# Altium PCB PCB2.PcbDoc
Units mm, origin at the board's own origin, x right, y up, seen from the top; angles counter-clockwise.
Board outline 80.65 x 74.17 mm, 2 copper layers (Top Layer, Bottom Layer); 29 components, 23 nets, 119 pads, 10 vias.
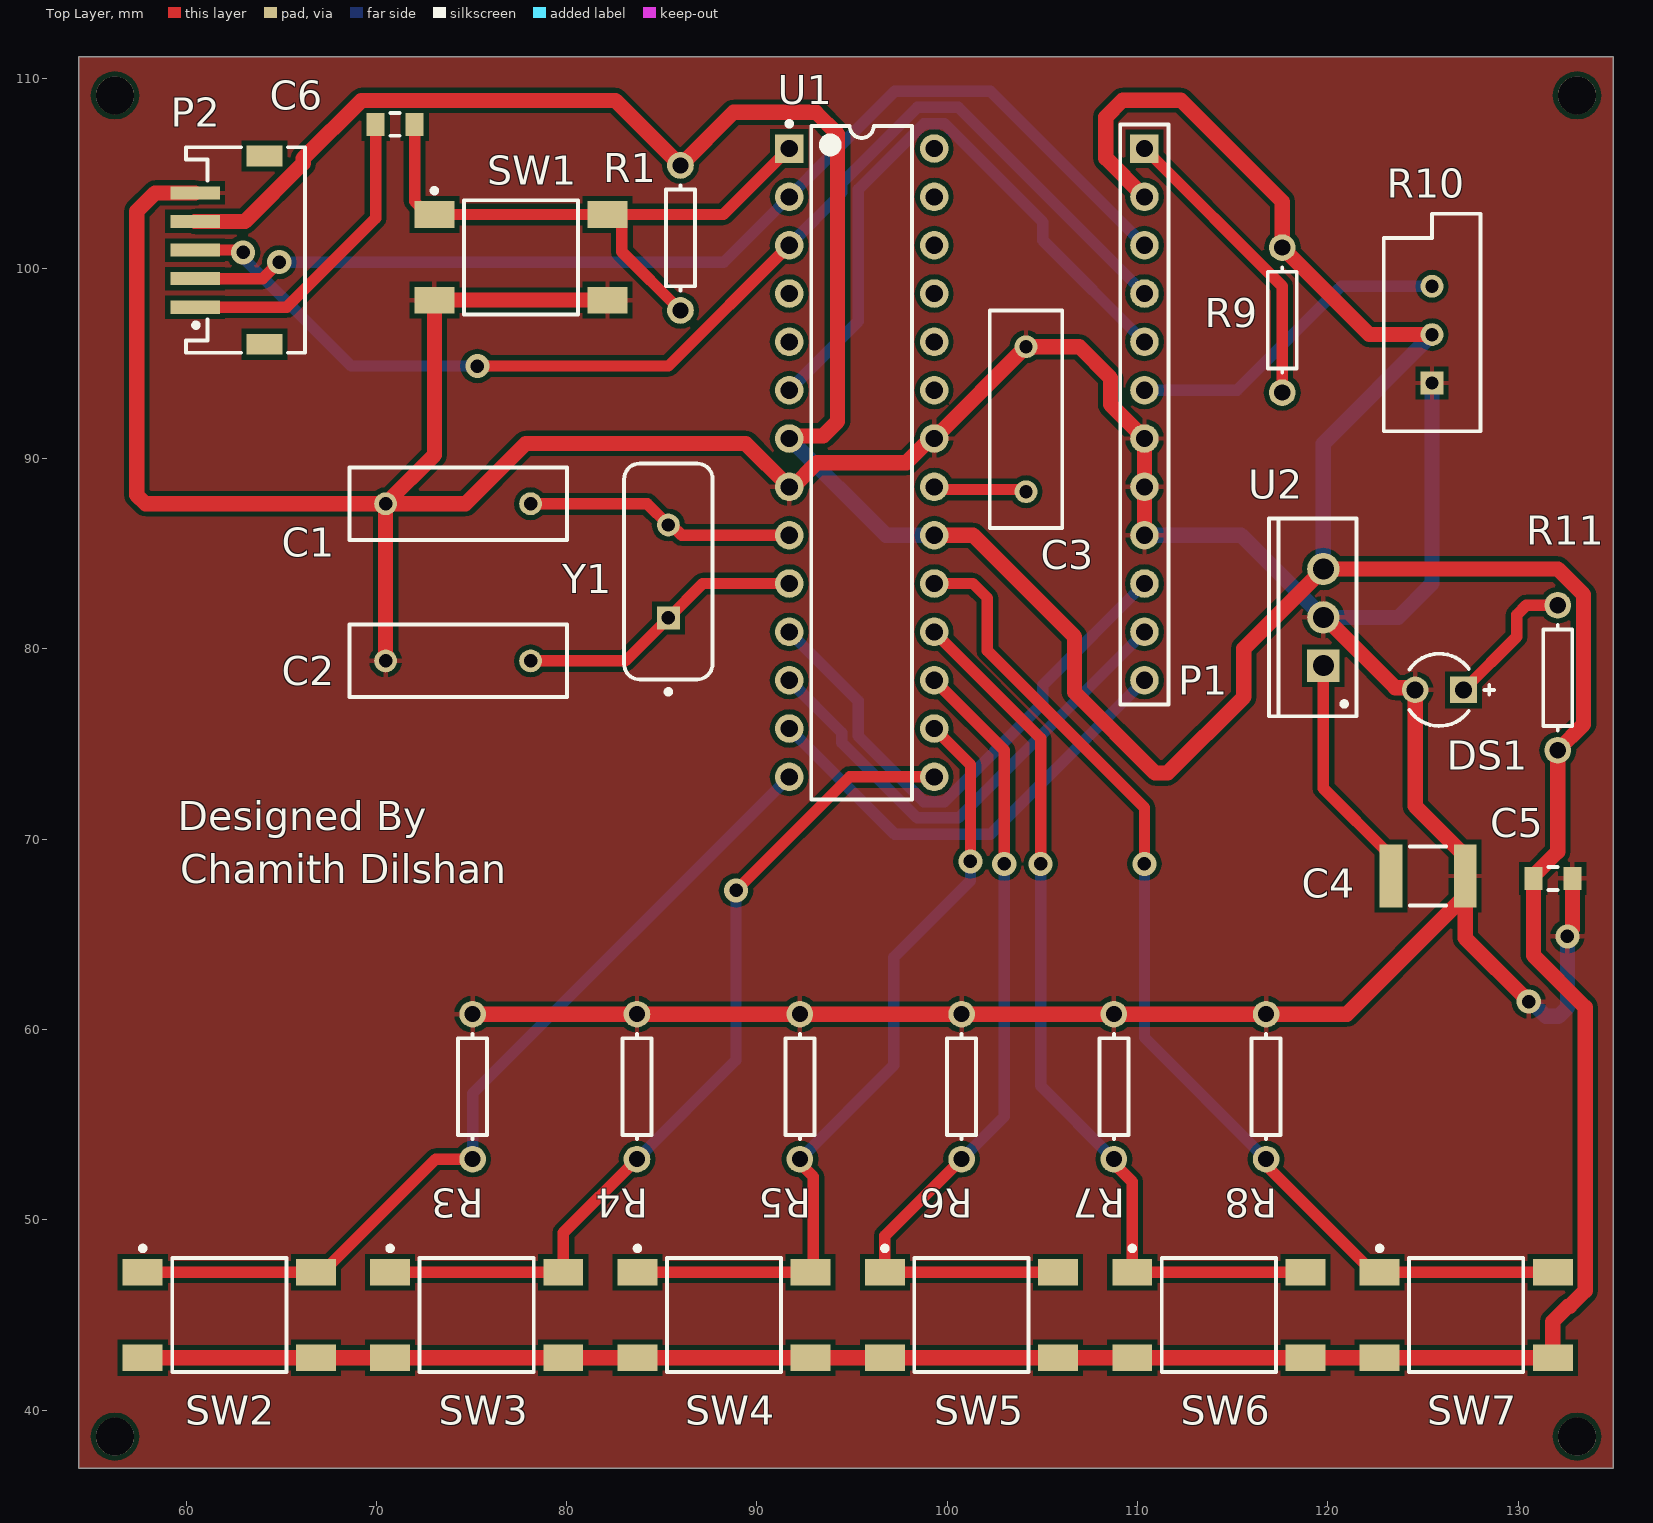
[diagram p0: Top Layer view]
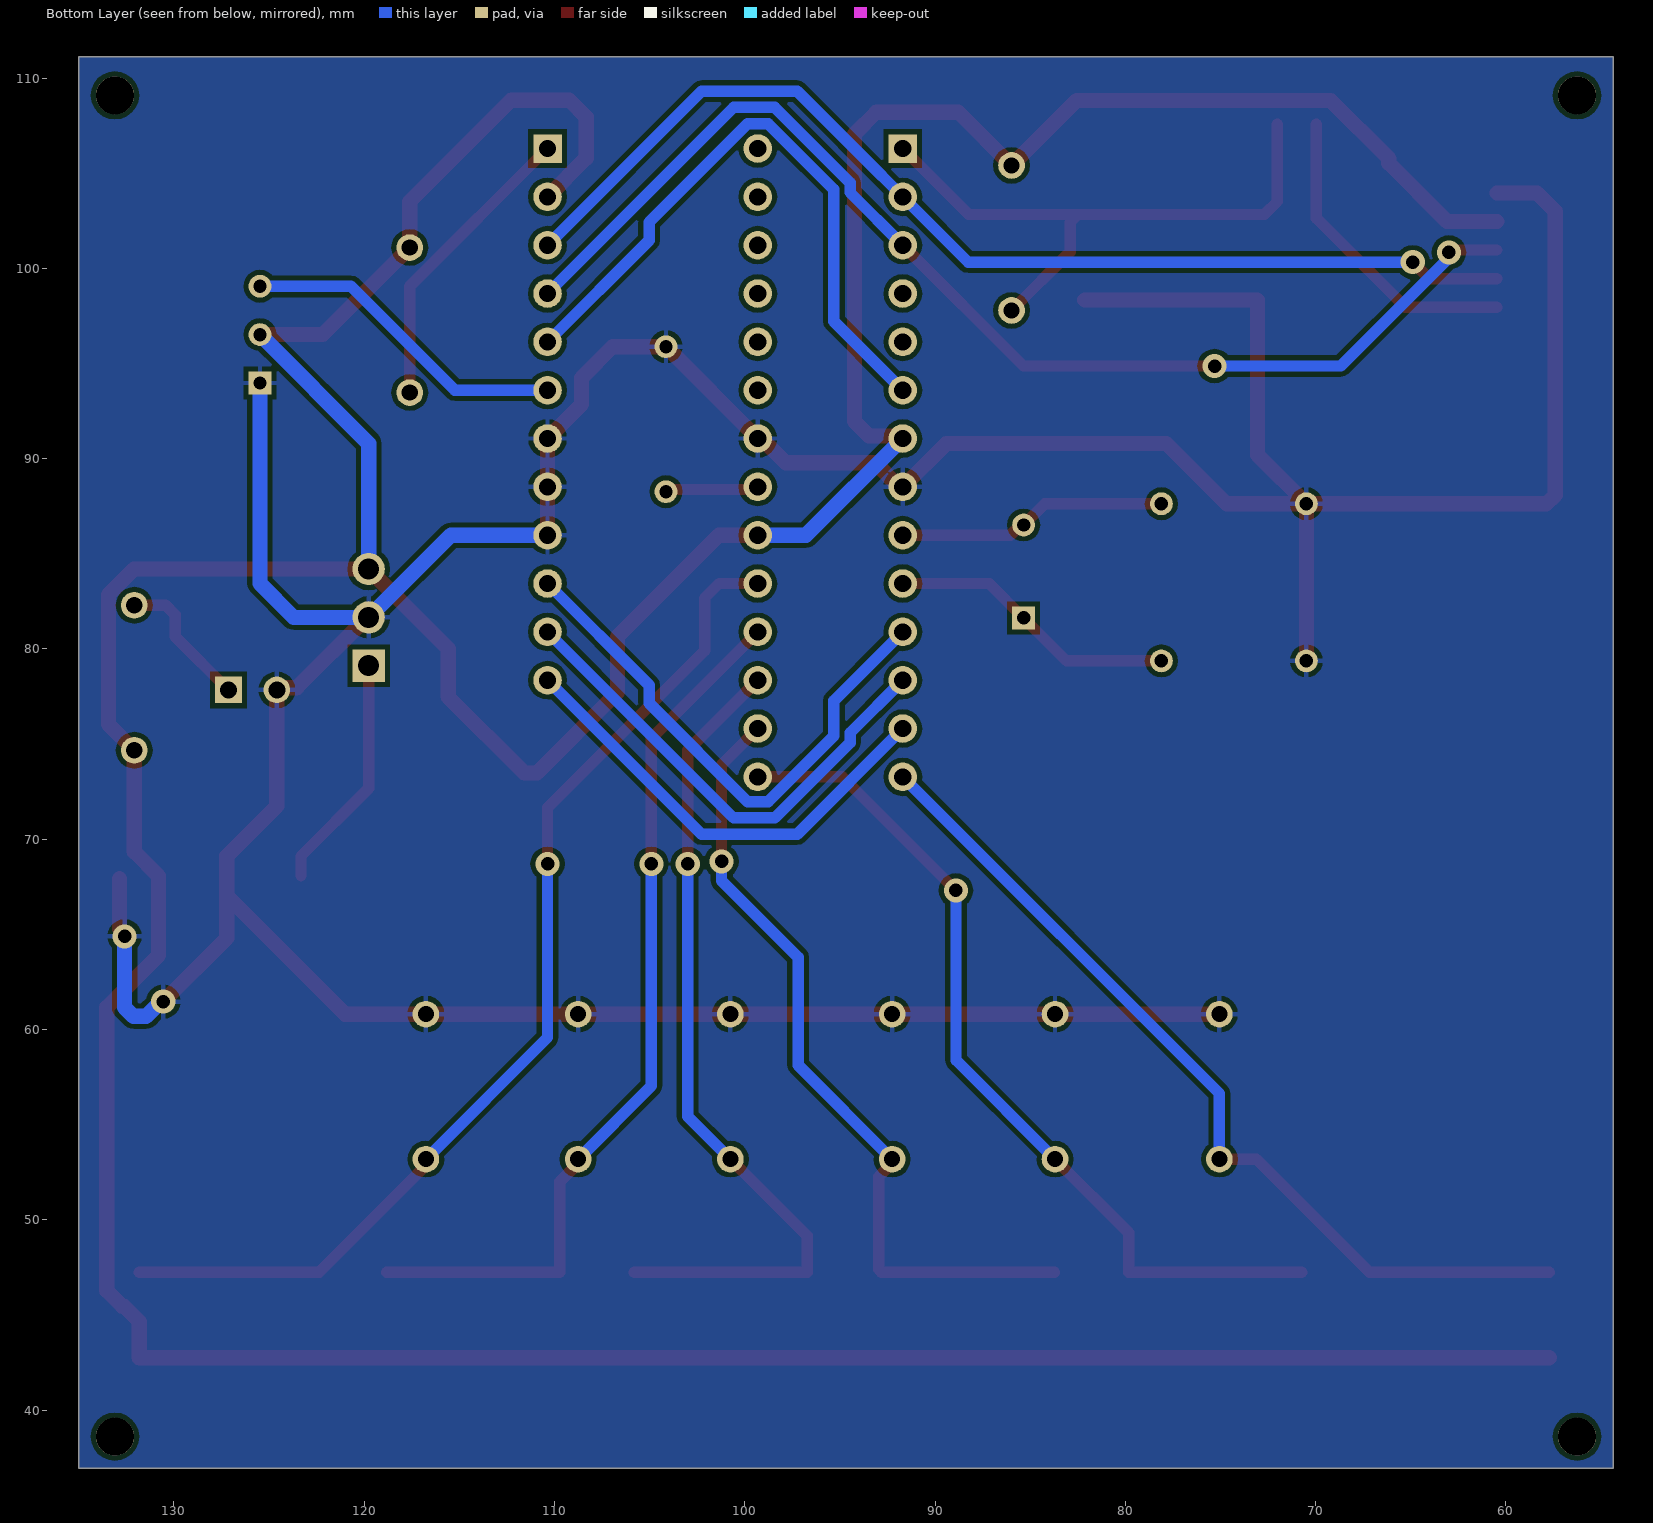
[diagram p1: Bottom Layer view, seen from below]

## Layer stack, top to bottom
Top Solder: solder mask 0.0102, Solder Resist, Dk 3.5
Top Layer: signal copper 0.0356
Dielectric 1: dielectric 0.32, FR-4, Dk 4.8
Bottom Layer: signal copper 0.0356
Bottom Solder: solder mask 0.0102, Solder Resist, Dk 3.5

## Board outline
54.356,111.125 135.001,111.125 135.001,36.957 54.356,36.957

## Design rules (kind name [scope] priority, off if disabled: settings)
Clearance [All] p1: gap=0.254 ignorepadtopadclearanceinfootprint=FALSE except(0: Arc-Hole Track-Hole SMDPad-Hole THPad-Hole Via-Hole Fill-Hole Poly-Hole Region-Hole Text-Hole)
PolygonConnect [All] p1: connectstyle=Relief reliefconductorwidth=0.254 reliefentries=4 polygonreliefangle="90 Angle" airgapwidth=0.254
RoutingVias [All] p1: holewidth=0.711 width=1.27 viastyle="Through Hole" minholewidth=0.711 minwidth=1.27 maxholewidth=0.711 maxwidth=1.27
SilkToSolderMaskClearance [IsPad] p1: minsilkscreentomaskgap=0.127 clearancetoexposedcopper=TRUE
SolderMaskExpansion [All] p1: expansion=0.102 istentingtop=FALSE
Width Width_1 [InNet('+5') or InNet('GND')] p1: maxlimit=0.9 minlimit=0.5 preferedwidth=0.8 minimp=50.000000 maximp=50.000000 favimp=50.000000
Width [All] p2: maxlimit=0.8 minlimit=0.3 preferedwidth=0.6 minimp=50.000000 maximp=50.000000 favimp=50.000000
29 further rules are at their usual default settings.

## Components (designator, comment, footprint, x,y, rotation, side; value= is the part's Value field where it differs from the comment)
C1 "22pF" RAD-0.3 74.295,87.63 r180 top
C2 "22pF" RAD-0.3 74.295,79.375 r180 top
C3 "100nF" RAD-0.3 104.14,92.075 r270 top
C4 "330nF" CAPC1812(4532)100_L 125.267,68.072 r180 top
C5 "100nF" FP-CGA3E-0_3-0_1-IPC_A 131.826,67.945 r0 top
C6 "100nF" FP-CGA3E-0_3-0_1-IPC_A 70.984,107.569 r180 top
DS1 "LED" INDPR60-254-520X380X650 125.857,77.851 r180 top
P1 "Header 12" HDR1X12 110.363,106.299 r270 top
P2 "To FTDI" 648105131822 63.119,100.965 r90 top
R1 "10K" AXIAL-0.3 85.979,101.6 r90 top
R3 "10K" AXIAL-0.3 75.057,57 r270 top
R4 "10K" AXIAL-0.3 83.693,57 r270 top
R5 "10K" AXIAL-0.3 92.254,57 r270 top
R6 "10K" AXIAL-0.3 100.754,57 r270 top
R7 "10K" AXIAL-0.3 108.754,57 r270 top
R8 "10K" AXIAL-0.3 116.754,57 r270 top
R9 "220 Ohm" AXIAL-0.3 117.602,97.282 r90 top
R10 "RPot" VR5 125.476,96.52 r90 top value=1K
R11 "1K" AXIAL-0.3 132.08,78.486 r90 top
SW1 "" TECO-FSM4JSMA_V 77.597,100.584 r90 top
SW2 "Select Button" TECO-FSM4JSMA_V 62.27,45 r90 top
SW3 "Up Button" TECO-FSM4JSMA_V 75.27,45 r90 top
SW4 "Down Button" TECO-FSM4JSMA_V 88.27,45 r90 top
SW5 "Left Button" TECO-FSM4JSMA_V 101.27,45 r90 top
SW6 "Right Button" TECO-FSM4JSMA_V 114.27,45 r90 top
SW7 "Back Button" TECO-FSM4JSMA_V 127.27,45 r90 top
U1 "ATmega328-PU" 28P3 95.504,89.789 r0 top
U2 "L78M05CV" TO220 119.761,81.661 r90 top
Y1 "16Mhz" FOX-FOXSLF160-20 85.344,84.074 r90 top

## Footprints (in the part's own frame and the unit in brackets; to place one, negate y for a bottom-side part, rotate by r counter-clockwise, add the part's x,y. Pads: shape width x height; smd on the part's side, far side on the other; paste and mask are expansions set on the pad)
28P3 [mm] "28-Pin Plastic Dual In-Line Package (PDIP)"
  rect 1.5x1.5 hole 0.9: 1(-3.81,16.51)
  round 1.5 hole 0.9: 2(-3.81,13.97) 3(-3.81,11.43) 4(-3.81,8.89) 5(-3.81,6.35) 6(-3.81,3.81) 7(-3.81,1.27) 8(-3.81,-1.27) 9(-3.81,-3.81) 10(-3.81,-6.35) 11(-3.81,-8.89) 12(-3.81,-11.43) 13(-3.81,-13.97) 14(-3.81,-16.51) 15(3.81,-16.51) 16(3.81,-13.97) 17(3.81,-11.43) 18(3.81,-8.89) 19(3.81,-6.35) 20(3.81,-3.81) 21(3.81,-1.27) 22(3.81,1.27) 23(3.81,3.81) 24(3.81,6.35) 25(3.81,8.89) 26(3.81,11.43) 27(3.81,13.97) 28(3.81,16.51)
  silkscreen extent -3.93,-17.7 2.65,17.93, body extent -3.6,-17.65 3.6,17.65, height 4.58
648105131822 [mm] "1.50mm SMT Male Horizontal Shrouded Header, 5p"
  rect 0.7x2.6 smd: 1(-3,2.65) 2(-1.5,2.65) 3(0,2.65) 4(1.5,2.65) 5(3,2.65)
  rect 1.1x1.9 smd: MP1(-4.95,-1) MP2(4.95,-1)
  silkscreen extent -5.4,-3.13 5.4,3.13, body extent -5.35,-3 5.35,3.47, height 3.74
AXIAL-0.3 [mm] "Axial Device, Thru-Hole; 2 Leads; 0.3 in Pin Spacing"
  round 1.4 hole 0.85: 1(-3.81,0) 2(3.81,0)
  silkscreen extent -2.77,-0.76 2.77,0.76
CAPC1812(4532)100_L [mm] "Chip Capacitor, Body 4.5x3.2mm, Height 1mm, IPC High Density"
  rect 1.2x3.3 smd: 1(-1.95,0) 2(1.95,0)
  silkscreen extent -0.95,-1.55 0.95,1.55, body extent -2.4,-1.7 2.4,1.7, height 1
FOX-FOXSLF160-20 [mm] "THD, 2-Leads, Body 11.35x4.65mm"
  rect 1.2x1.2 hole 0.7: 1(-2.44,0)
  round 1.2 hole 0.7: 2(2.44,0)
  silkscreen extent -6.45,-2.32 5.68,2.32, body extent -5.67,-2.32 5.68,2.33, height 3.6
FP-CGA3E-0_3-0_1-IPC_A [mm]
  rect 0.956x1.206 smd paste+0 mask+0: 1(-1.025,0) 2(1.025,0)
  silkscreen extent -0.25,-0.6 0.25,0.6, body extent -2,-1.1 2,1.1, height 0.25
HDR1X12 [mm] "Connector; Header; 12 Position"
  rect 1.5x1.5 hole 0.9: 1(0,0)
  round 1.5 hole 0.9: 2(2.54,0) 3(5.08,0) 4(7.62,0) 5(10.16,0) 6(12.7,0) 7(15.24,0) 8(17.78,0) 9(20.32,0) 10(22.86,0) 11(25.4,0) 12(27.94,0)
  silkscreen extent -1.27,-1.27 29.21,1.27
INDPR60-254-520X380X650 [mm] "THD, 2-Leads, Dia 3.8mm, Pitch 2.54mm"
  rect 1.4x1.4 hole 0.9: 1(-1.27,0)
  round 1.4 hole 0.9: 2(1.27,0)
  silkscreen extent -2.87,-1.9 1.58,1.9, body extent -1.9,-1.9 1.9,1.9, height 6.5
RAD-0.3 [mm] "Radial Cap, Thru-Hole; 2 Leads; 0.3 in Pin Spacing"
  round 1.2 hole 0.7: 1(-3.81,0) 2(3.81,0)
  silkscreen extent -5.71,-1.91 5.71,1.91
TECO-FSM4JSMA_V [mm] "SMD, 4-Leads, Body 6x6mm, Pitch 4.5mm"
  rect 1.4x2.1 smd: 1(2.25,4.55) 2(2.25,-4.55) 3(-2.25,4.55) 4(-2.25,-4.55)
  silkscreen extent -3,-3 3.62,4.67, body extent -3,-5 3,5, height 5.08
TO220 [mm] "TO, Thru-Hole, Vertical, Heatsink Mounted; 3 In-Line Leads; Pitch 2.54 mm"
  rect 1.7x1.7 hole 1.1: 1(-2.54,0)
  round 1.7 hole 1.1: 2(0,0) 3(2.54,0)
  silkscreen extent -5.2,-1.75 5.2,2.85, body extent -5.25,-1.8 5.25,2.9, height 19.7
VR5 [mm] "Thru-Hole; 3 Leads"
  rect 1.2x1.2 hole 0.7: 1(-2.54,0)
  round 1.2 hole 0.7: 2(0,0) 3(2.54,0)
  silkscreen extent -5.08,-2.54 6.35,2.54

## Part data
C1 C2 C3: library part Cap, "Capacitor", LatestRevisionDate=17-Jul-2002, LatestRevisionNote="Re-released for DXP Platform.", PackageDescription="Radial Cap, Thru-Hole; 2 Leads; 0.3 in Pin Spacing", PackageReference=RAD-0.3, Published=8-Jun-2000, Publisher="Altium Limited"
C4: library part CMP-1040-01492-1, "CAP 330nF 50V ±10% 1812 (4532 Metric) Thickness 1mm SMD", Case-EIA=1812, Case-Metric=4532, Rated Voltage="50 V", Tolerance=Â±10%, Max Thickness="1 mm", Technology=SMT
C5 C6: library part CMP-2000-07546-2, "Cap Ceramic 100nF 50V X7R 10% Pad SMD 0603 +125°C Automotive T/R", Case Code (Imperial)=0603, Case Code (Metric)=1608, Dielectric=X7R, Max Operating Temperature=125°C, Min Operating Temperature=-55°C, Package Quantity=1, Ratings=AEC-Q200, Tolerance=10%, Voltage=50V, Capacitance=100nF, Case/Package=0603, Composition=Ceramic, Depth=0.8mm, Height=0.8mm, Lead Free="Lead Free", Length=1.6mm, Mount="Surface Mount", Packaging="Tape and Reel", Radiation Hardening=No, REACH SVHC="No SVHC", Termination=SMD/SMT, Thickness=0.035inch, Voltage Rating=50V, Voltage Rating (DC)=50V, Weight=7.1E-05oz, Width=0.8mm
DS1: library part CMP-1674-00005-1, "Radial LED, 12.6 mcd, 20 mA, 2 V, -55 to 100 degC, 2-Pin THD, RoHS, Bulk", Case\Package=Radial, Current Rating="3.6 A", Max Operating Temperature="130 degC", Min Operating Temperature="-40 degC", Package Quantity=55, Resistance="0.045 Ohm", Tolerance=20%, ComponentLink1Description="Manufacturer URL", ComponentLink1URL=http://www.us.liteon.com/, ComponentLink2Description=Datasheet, ComponentLink2URL=https://datasheet.ciiva.com/15117/getdatasheetpartid-187746-15117985.pdf, DatasheetVersion=Dec-03, Height="1.1 inch", Lead Pitch="11.44 mm", Length="0.97 inch", Mount="Through Hole", PackageDescription="2-Pin Through Hole Device, Dia 3.8 mm, Pitch 2.54 mm", PackageReference=LTL-1CHE, Packaging=Tray, Radiation Hardening=No, RoHSCompliant=true, Shielding=Unshielded, Width="0.62 inch"
P1: "Header, 12-Pin", LatestRevisionDate=17-Jul-2002, LatestRevisionNote="Re-released for DXP Platform.", Publisher="Altium Limited"
P2: library part CMP-1502-00733-1, "Male Shrouded Header WR-WTB, SMT, Right Angled, pitch 1.5 mm, 1 x 5 position", Contact Resistance=20mOhm, Manufacturer="Wurth Elektronik", Operating Temperature=-25to85degC, Package Reference=648105131822, Working Voltage=50VAC, Datasheet URL=https://katalog.we-online.de/em/datasheet/6481xx131822.pdf, Gender=Male, Manufacturer URL=http://www.we-online.de, Mounting Technology=SMT, Orientation=RightAngled, Packaging=TapeandReel, Part Number=648105131822, Pitch=1.5mm, Position=1x5, Publisher=WurthElektronik
R1 R3 R4 R5 R6 R7 R8 R9 R11: library part Res1, "Resistor", LatestRevisionDate=17-Jul-2002, LatestRevisionNote="Re-released for DXP Platform.", PackageDescription="Axial Device, Thru-Hole; 2 Leads; 0.3 in Pin Spacing", PackageReference=AXIAL-0.3, Published=8-Jun-2000, Publisher="Altium Limited"
R10: "Potentiometer", LatestRevisionDate=17-Jul-2002, LatestRevisionNote="Re-released for DXP Platform.", PackageDescription="Variable Resistor, Thru-Hole; 3 Leads", PackageReference=VR5, Published=8-Jun-2000, Publisher="Altium Limited", Set Position=0.5, Sim Note="Enter the Resistance value and the set point into parameter fields."
SW1 SW2 SW3 SW4 SW5 SW6 SW7: library part CMP-2000-05602-2, "Swicth, SPST, 24 V, -35 to 85 degC, 4-Pin SMD, RoHS, Tape and Reel", Case\/Package=SMD/SMT, Contact Current Rating=50mA, Contact Resistance=100mOhm, Manufacturer="TE Connectivity", Max Operating Temperature=85degC, Max Voltage Rating (DC)=12V, Min Operating Temperature=-35degC, Operating Force=1.57N, Package Description="4-Pin Surface Mount Device, Body 6 x 6 mm, Pitch 4.5 mm", Package Quantity=750, Package Reference=FSM4JSMA, Voltage Rating=24V, Actuator Length=0.055inch, Actuator Material=Polyamide, Contact Material=CopperAlloy, Contact Plating=Silver, Current Rating=50mA, Datasheet URL=http://www.te.com/commerce/DocumentDelivery/DDEController?Action=showdoc&DocId=Customer+Drawing%7F2-1437565-7%7FV%7Fpdf%7FEnglish%7FENG_CD_2-1437565-7_V.pdf%7F4-1437565-2, Datasheet Version="Rev. V, 02/2015", Electrical Life=100000Cycles, Illumination Type=Illuminated, Length=6mm, Manufacturer URL=http://www.te.com/, Mechanical Life=100000Cycles, Mount=SurfaceMount, Mounting Technology=SurfaceMount, Orientation=Straight, Packaging=LoosePiece, REACH SVHC=Unknown, RoHSCompliant=true, Switch Travel=0.25mm, Termination=GullWing, Throw Configuration=SPST, Voltage Rating (DC)=24V, Width=6mm
U1: library part CMP-0095-00015-2, "8-bit AVR Microcontroller, 32KB Flash, 1KB EEPROM, 2KB SRAM, 28-pin PDIP, Industrial Grade (-40°C to 85°C)", ComponentLink1Description="Manufacturer URL", ComponentLink1URL=http://www.atmel.com/, ComponentLink2Description="ATmega48A/48PA/88A/88PA/168A/168PA/328/328P Datasheet", ComponentLink2URL=http://www.atmel.com/dyn/resources/prod_documents/8271.pdf, ComponentLink3Description="ATmega48A/48PA/88A/88PA/168A/168PA/328/328P Summary", ComponentLink3URL=http://www.atmel.com/dyn/resources/prod_documents/8271S.pdf, DatasheetVersion="revD, May-2011", PackageDescription="28-lead (0.300\"/7.62mm Wide) Plastic Dual Inline Package (PDIP)", PackageReference=28P3, PackageVersion="revB, Sep-2001", RevisionNote="DatasheetVersion updated. URLs added."
U2: library part CMP-0244-00437-1, "Positive Voltage Regulator, 5V, 3-Pin TO-220", ComponentLink1Description="Manufacturer URL", ComponentLink1URL=http://www.st.com, ComponentLink2Description=Datasheet, ComponentLink2URL=http://www.st.com/internet/com/TECHNICAL_RESOURCES/TECHNICAL_LITERATURE/DATASHEET/CD00000447.pdf, ComponentLink3Description="Package Specification", ComponentLink3URL=http://www.st.com/internet/com/TECHNICAL_RESOURCES/TECHNICAL_LITERATURE/PACKAGE_INFORMATION/CD00004649.pdf, DatasheetVersion=1/11/2010, PackageDescription="TO, Thru-Hole, Vertical, Heatsink Mounted; 3 In-Line Leads; Pitch 2.54 mm", PackageReference=TO220, PackageVersion=ver3.0
Y1: library part CMP-1749-00003-1, "Resistance Weld Thru-Hole Crystal, 16 MHz, -20 to 70 degC, 2-Pin THD, RoHS, Bulk", Case\Package=Axial, Max Operating Temperature="155 degC", Min Operating Temperature="-55 degC", Package Quantity=200, Power Rating="250 mW", Resistance="221 kohm", Tolerance=1%, Voltage Rating="250 V", ComponentLink1Description="Manufacturer URL", ComponentLink1URL=http://www.foxonline.com/, ComponentLink2Description=Datasheet, ComponentLink2URL=http://www.foxonline.com/pdfs/hc49slf.pdf, DatasheetVersion=Mar-15, Length="0.248 inch", Mount="Through Hole", PackageDescription="2-Pin Through Hole Device, Body 11.35 x 4.65 mm", PackageReference=FOXSLF160-20, Packaging=Bulk, RoHSCompliant=true

## Free pads (board coordinates)
  round 2 hole 2 unplated: 3(56.261,38.608) 3(133.096,38.608) 3(133.096,109.093) 4(56.261,109.093)

## Via types
v1: diameter 1.27, hole 0.711, Top Layer to Bottom Layer, 10 vias

## Nets (pads, with @x,y where several pads share a name; then routed paths per layer and width w, separated by ;. In a path a pad name is that pad's centre, name@x,y a point inside that pad or via, vN(x,y) a via of type N, cw(c..) or ccw(c..) an arc to the next point about the centre after c; other vN are vias at no path point)
+5: C5.1 P1.2 P2.4 R1.2 R9.2 R10.2 R11.1 SW2.3 SW2.4 SW3.3 SW3.4 SW4.3 SW4.4 SW5.3 SW5.4 SW6.3 SW6.4 SW7.3 SW7.4 U1.7 U1.20 U2.3 | length 275.7
  Top Layer w0.8: SW2.3 SW2.4 SW3.3 SW3.4 SW4.3 SW4.4 SW5.3 SW5.4 SW6.3 SW6.4 SW7.3 SW7.4 131.82,44.65 132.635,45.465 132.709,45.465 133.524,46.279 133.524,61.167 130.801,63.89 C5.1 130.801,68.07 132.08,69.349 R11.1 133.434,76.03 133.434,82.857 132.09,84.201 U2.3 115.586,80.026 115.586,77.486 111.583,73.483 110.921,73.483 106.68,77.724 106.68,80.645 101.346,85.979 U1.20 ; P2.4 63.094,102.465 66.152,105.523 66.152,105.768 69.21,108.826 82.563,108.826 R1.2 88.773,108.204 93.091,108.204 94.234,107.061 94.234,91.948 93.479,91.193 91.828,91.193 U1.7 ; P1.2 108.331,105.791 108.331,107.95 109.22,108.839 112.268,108.839 117.602,103.505 R9.2 122.174,96.52 R10.2
  Bottom Layer w0.8: U1.7 96.774,85.979 U1.20 ; U2.3 119.761,90.805 R10.2
Back_But: R8.2 SW7.1 SW7.2 U1.19 | length 56.4
  Top Layer w0.6: U1.19 101.346,83.439 102.108,82.677 102.108,79.91 110.363,71.655 v1(110.363,68.707) ; R8.2 116.907,53.037 116.907,52.713 122.37,47.25 SW7.1 SW7.2
  Bottom Layer w0.6: v1(110.363,68.707) 110.363,59.581 R8.2
D4: P1.5 U1.6 | length 33.8
  Bottom Layer w0.6: U1.6 95.32,97.225 95.32,104.149 98.774,107.603 99.854,107.603 105.022,102.435 105.022,101.48 P1.5
D5: P1.10 U1.11 | length 28.8
  Bottom Layer w0.6: U1.11 95.32,77.273 95.32,75.429 98.774,71.975 99.854,71.975 105.022,77.143 105.022,78.098 P1.10
D6: P1.11 U1.12 | length 26
  Bottom Layer w0.6: U1.12 94.466,75.587 94.466,75.075 98.42,71.121 100.585,71.121 P1.11
D7: P1.12 U1.13 | length 24.3
  Bottom Layer w0.6: U1.13 97.246,70.267 102.271,70.267 P1.12
Down_But: R5.2 SW4.1 SW4.2 U1.16 | length 42.5
  Top Layer w0.6: SW4.1 SW4.2 92.964,47.394 92.964,52.264 92.254,52.974 R5.2 ; U1.16 101.219,73.914 v1(101.219,68.834)
  Bottom Layer w0.6: R5.2 97.193,58.129 97.193,63.792 101.219,67.818 v1(101.219,68.834)
EN: P1.4 P2.3 U1.3 | length 62.6
  Top Layer w0.6: P2.3 62.865,100.965 v1(62.992,100.838) ; v1(75.311,94.869) 85.344,94.869 U1.3
  Bottom Layer w0.6: v1(62.992,100.838) 63.119,100.711 63.119,100.426 68.677,94.869 v1(75.311,94.869) ; U1.3 94.466,103.991 94.466,104.503 98.42,108.457 100.585,108.457 P1.4
GND: C1.2 C2.2 C3.1 C4.1 C5.2 DS1.2 P1.7 P1.8 P1.9 P2.5 R3.1 R4.1 R5.1 R6.1 R7.1 R8.1 R10.1 SW1.3 SW1.4 U1.8 U1.22 U2.2 | length 231.5
  Top Layer w0.8: P2.5 58.372,103.965 57.404,102.997 57.404,88.099 57.873,87.63 C1.2 ; C2.2 C1.2 ; R3.1 R4.1 R5.1 R6.1 R7.1 R8.1 121.005,60.81 C4.1@127.217,67.022 ; SW1.4 SW1.3 73.047,90.192 C1.2 ; P1.9 P1.8 P1.7 108.582,92.84 108.582,94.237 106.934,95.885 C3.1 U1.22 99.125,91.059 97.855,89.789 93.153,89.789 91.883,88.519 U1.8 89.408,90.805 77.851,90.805 74.676,87.63 C1.2 ; U2.2 119.846,81.661 123.541,77.966 124.472,77.966 DS1.2 124.587,71.752 127.217,69.122 C4.1 C4.1@127.217,67.022 ; v1(130.556,61.468) 127.217,64.807 C4.1@127.217,67.022 ; v1(132.588,64.897) 132.588,65.024 132.851,65.287 C5.2
  Bottom Layer w0.8: P1.9 115.443,85.979 U2.2 ; U2.2@119.676,81.661 U2.2 ; R10.1 125.476,83.439 123.698,81.661 U2.2 ; v1(130.556,61.468) 130.683,61.468 131.457,60.695 132.119,60.695 132.588,61.163 v1(132.588,64.897)
Left_But: R4.2 SW3.1 SW3.2 U1.15 | length 45.8
  Top Layer w0.6: SW3.1 SW3.2 79.82,49.317 R4.2 ; v1(88.9,67.31) 94.869,73.279 U1.15
  Bottom Layer w0.6: R4.2 88.9,58.397 v1(88.9,67.31)
NetC1_1: C1.1 U1.9 Y1.2 | length 14.3
  Top Layer w0.6: C1.1 84.228,87.63 Y1.2 85.506,86.514 86.041,85.979 U1.9
NetC2_1: C2.1 U1.10 Y1.1 | length 15.3
  Top Layer w0.6: C2.1 83.085,79.375 Y1.1 87.149,83.439 U1.10
NetC3_2: C3.2 U1.21 | length 4.9
  Top Layer w0.6: U1.21 99.453,88.38 104.025,88.38 C3.2
NetC6_2: C6.2 P2.1 | length 16.4
  Top Layer w0.6: P2.1 65.29,97.965 69.959,102.634 C6.2
NetDS1_1: DS1.1 R11.2 | length 7.5
  Top Layer w0.6: DS1.1 129.921,80.645 129.921,81.788 130.429,82.296 R11.2
NetP1_1: P1.1 R9.1 | length 15.8
  Top Layer w0.6: P1.1 117.602,99.06 R9.1
NetP1_6: P1.6 R10.3 | length 17.4
  Bottom Layer w0.6: P1.6 115.23,93.599 120.691,99.06 R10.3
Reset: C6.1 R1.1 SW1.1 SW1.2 U1.1 | length 31.9
  Top Layer w0.6: C6.1 72.009,103.522 72.697,102.834 SW1.1 SW1.2 SW1.2@82.497,102.834 ; R1.1 82.897,100.872 82.897,102.434 SW1.2@82.497,102.834 ; U1.1 88.229,102.834 SW1.2@82.497,102.834
Right_But: R7.2 SW6.1 SW6.2 U1.18 | length 47.1
  Top Layer w0.6: U1.18 104.902,75.311 v1(104.902,68.707) ; R7.2 108.754,52.974 109.72,52.008 SW6.1 SW6.2
  Bottom Layer w0.6: v1(104.902,68.707) 104.902,57.042 R7.2
RS: P1.3 P2.2 U1.2 | length 57.3
  Top Layer w0.6: P2.2 64.032,99.465 v1(64.897,100.33)
  Bottom Layer w0.6: v1(64.897,100.33) 88.265,100.33 97.246,109.311 102.271,109.311 P1.3
Select_But: R3.2 SW2.1 SW2.2 U1.14 | length 46.8
  Top Layer w0.6: SW2.1 SW2.2 67.17,47.25 73.11,53.19 R3.2
  Bottom Layer w0.6: R3.2 75.057,56.642 U1.14
Up_But: R6.2 SW5.1 SW5.2 U1.17 | length 44.3
  Top Layer w0.6: U1.17 102.997,74.676 v1(102.997,68.707) ; R6.2 96.72,49.156 SW5.1 SW5.2
  Bottom Layer w0.6: R6.2 102.997,55.433 v1(102.997,68.707)
VCC: C4.2 U2.1 | length 12.5
  Top Layer w0.6: U2.1 119.761,72.678 123.317,69.122 C4.2
pads on no net: P2.MP1 P2.MP2 U1.4 U1.5 U1.23 U1.24 U1.25 U1.26 U1.27 U1.28

## Polygon pours and split planes (outlines as drawn)
GND on Top Layer "GND_L01_P000" (solid, pour order 0): 54.356,111.125 135.001,111.125 135.001,36.957 54.356,36.957
GND on Bottom Layer "GND_L02_P001" (solid, pour order 1): 54.356,111.125 135.001,111.125 135.001,36.957 54.356,36.957

## Silkscreen, mask and mechanical layers (free items; w line width, h text height)
Top Overlay:
  text "Designed By" at 59.563,70.485 h1.52
  text "Chamith Dilshan" at 59.69,67.691 h1.52
Outline:
  lines w0.125: 54.356,36.957 54.356,111.125 135.001,111.125 135.001,36.957 54.356,36.957 ; 54.356,36.957 54.356,36.957